# Altium PCB PCB1.PcbDoc
Units mil, origin at the board's own origin, x right, y up, seen from the top; angles counter-clockwise.
Board outline 1230.03 x 1220.03 mil, 2 copper layers (Top Layer, Bottom Layer), stack 62.192 mil thick; 29 components, 15 nets, 77 pads, 16 vias.
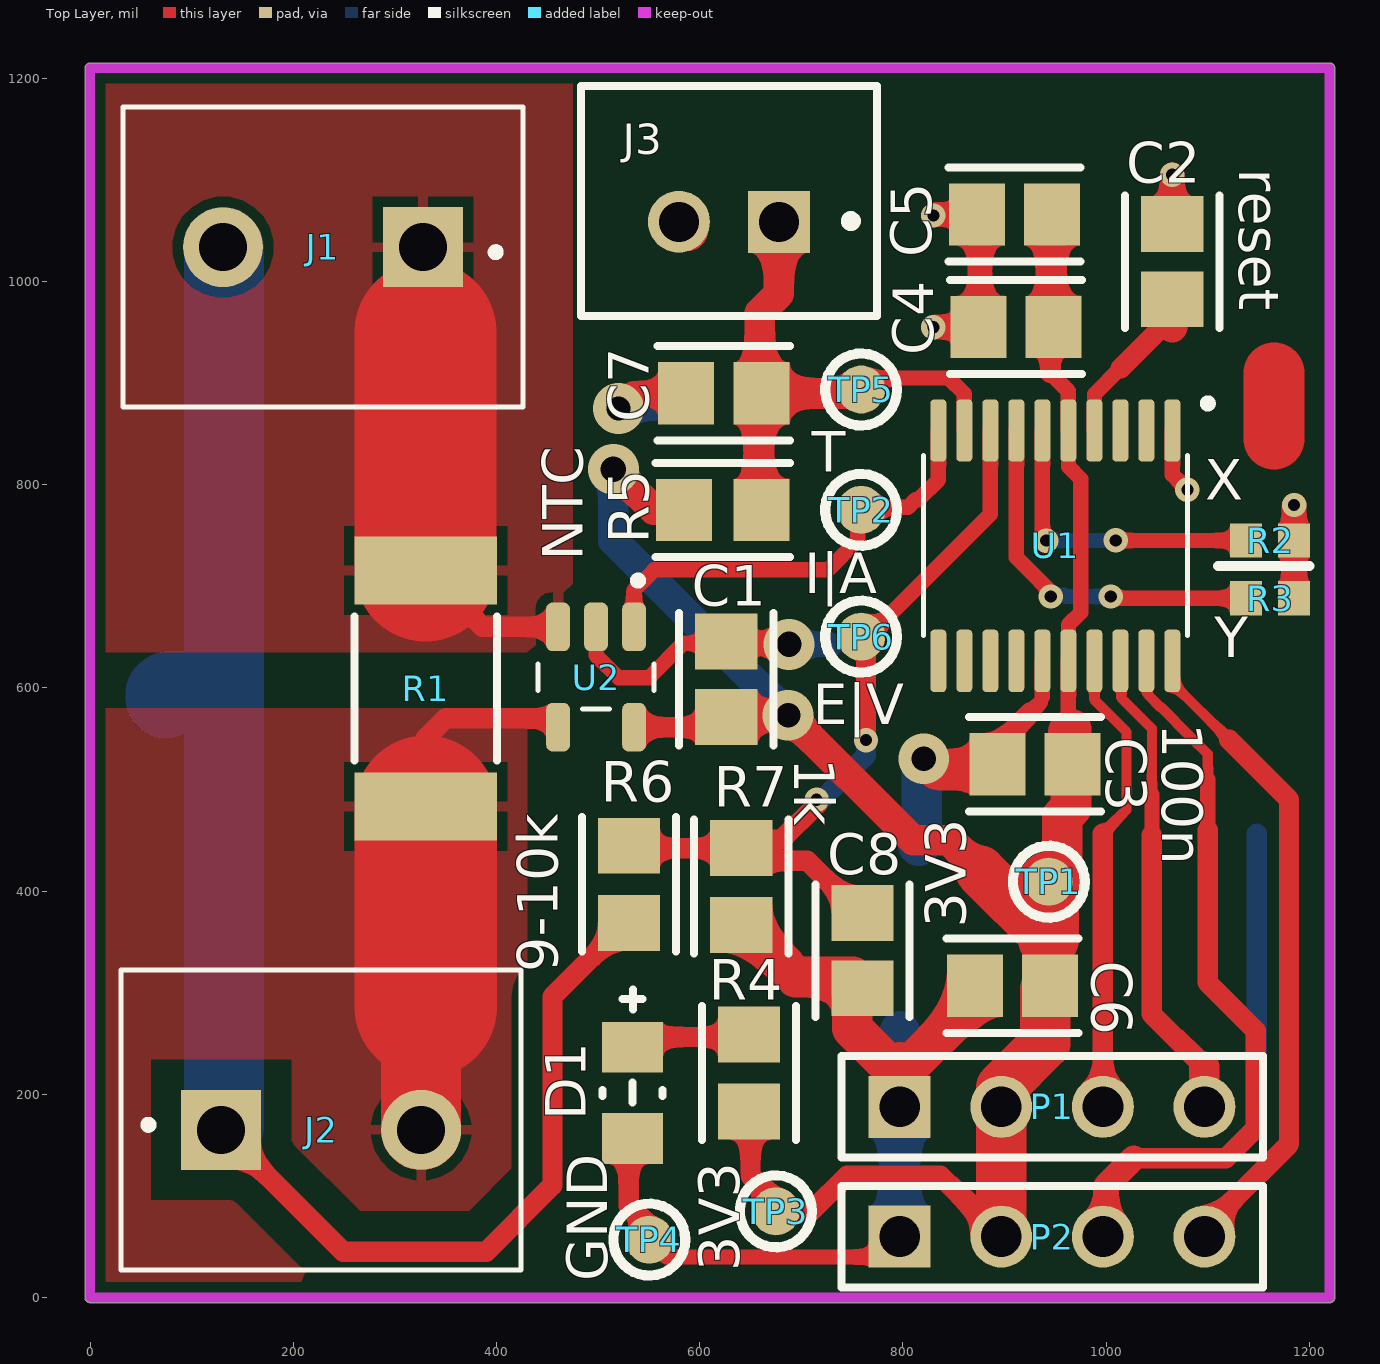
[diagram p0: Top Layer view]
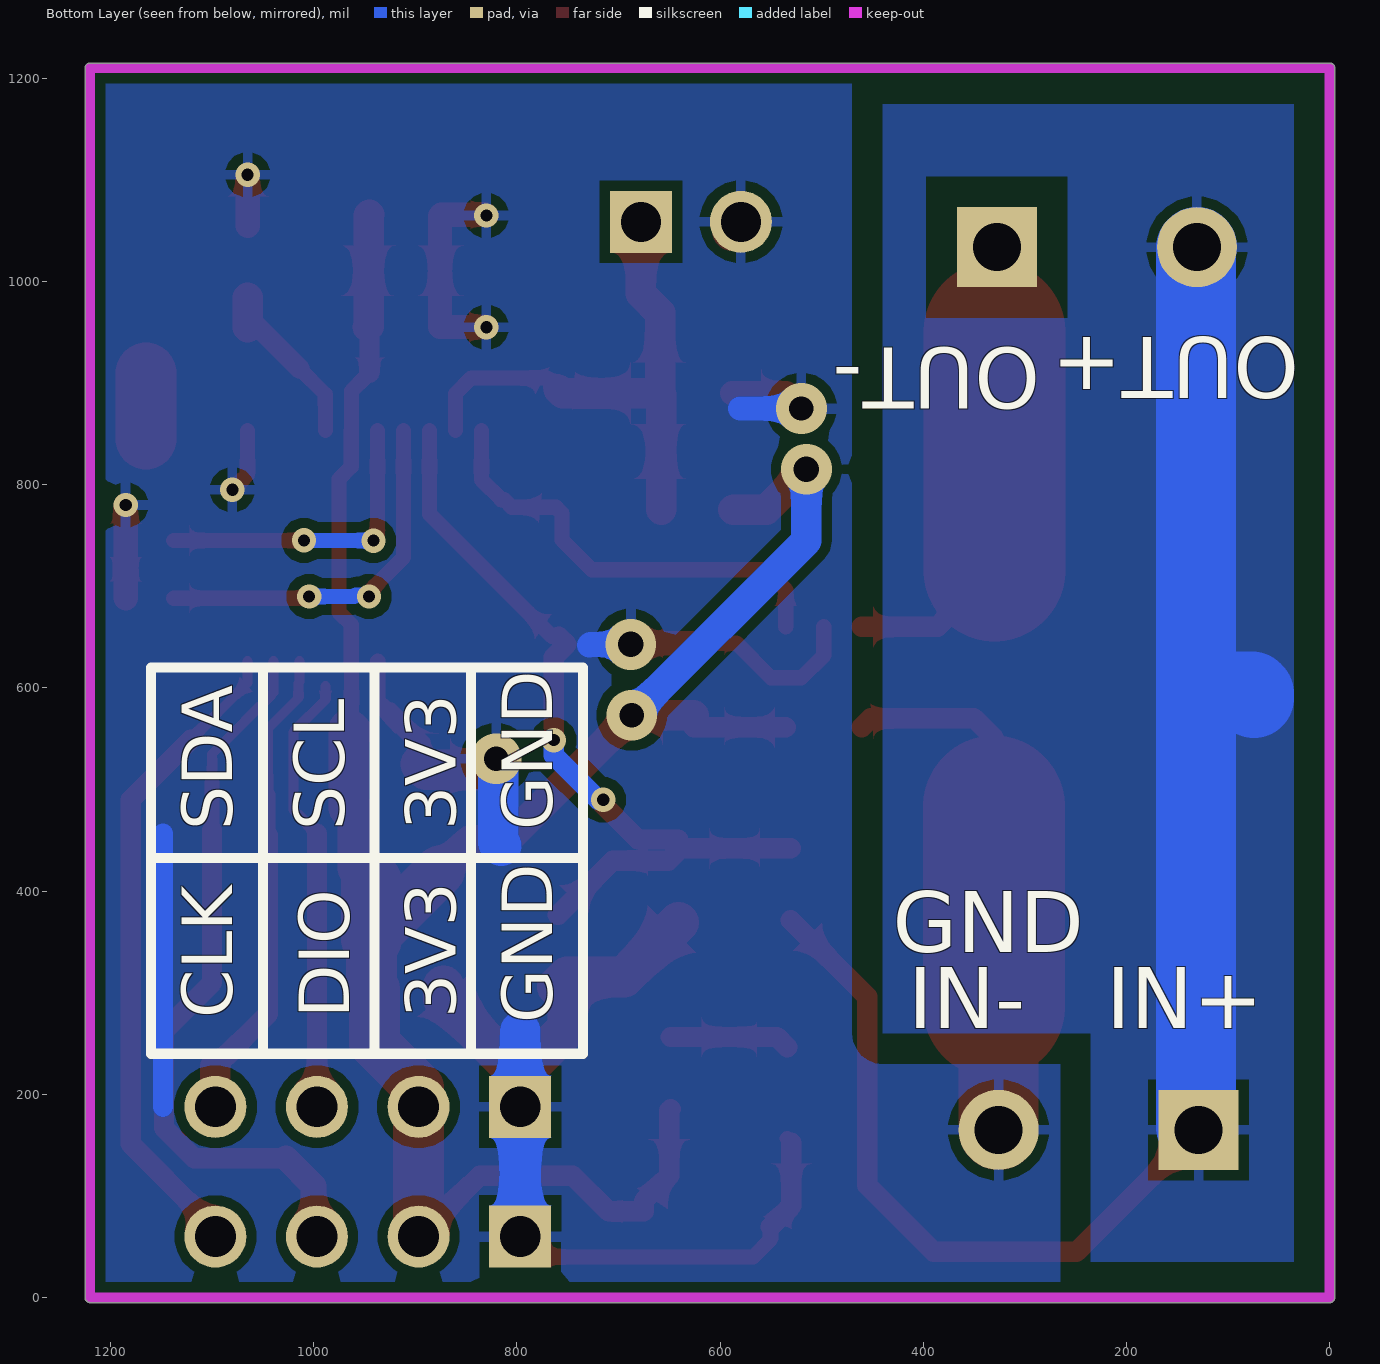
[diagram p1: Bottom Layer view, seen from below]
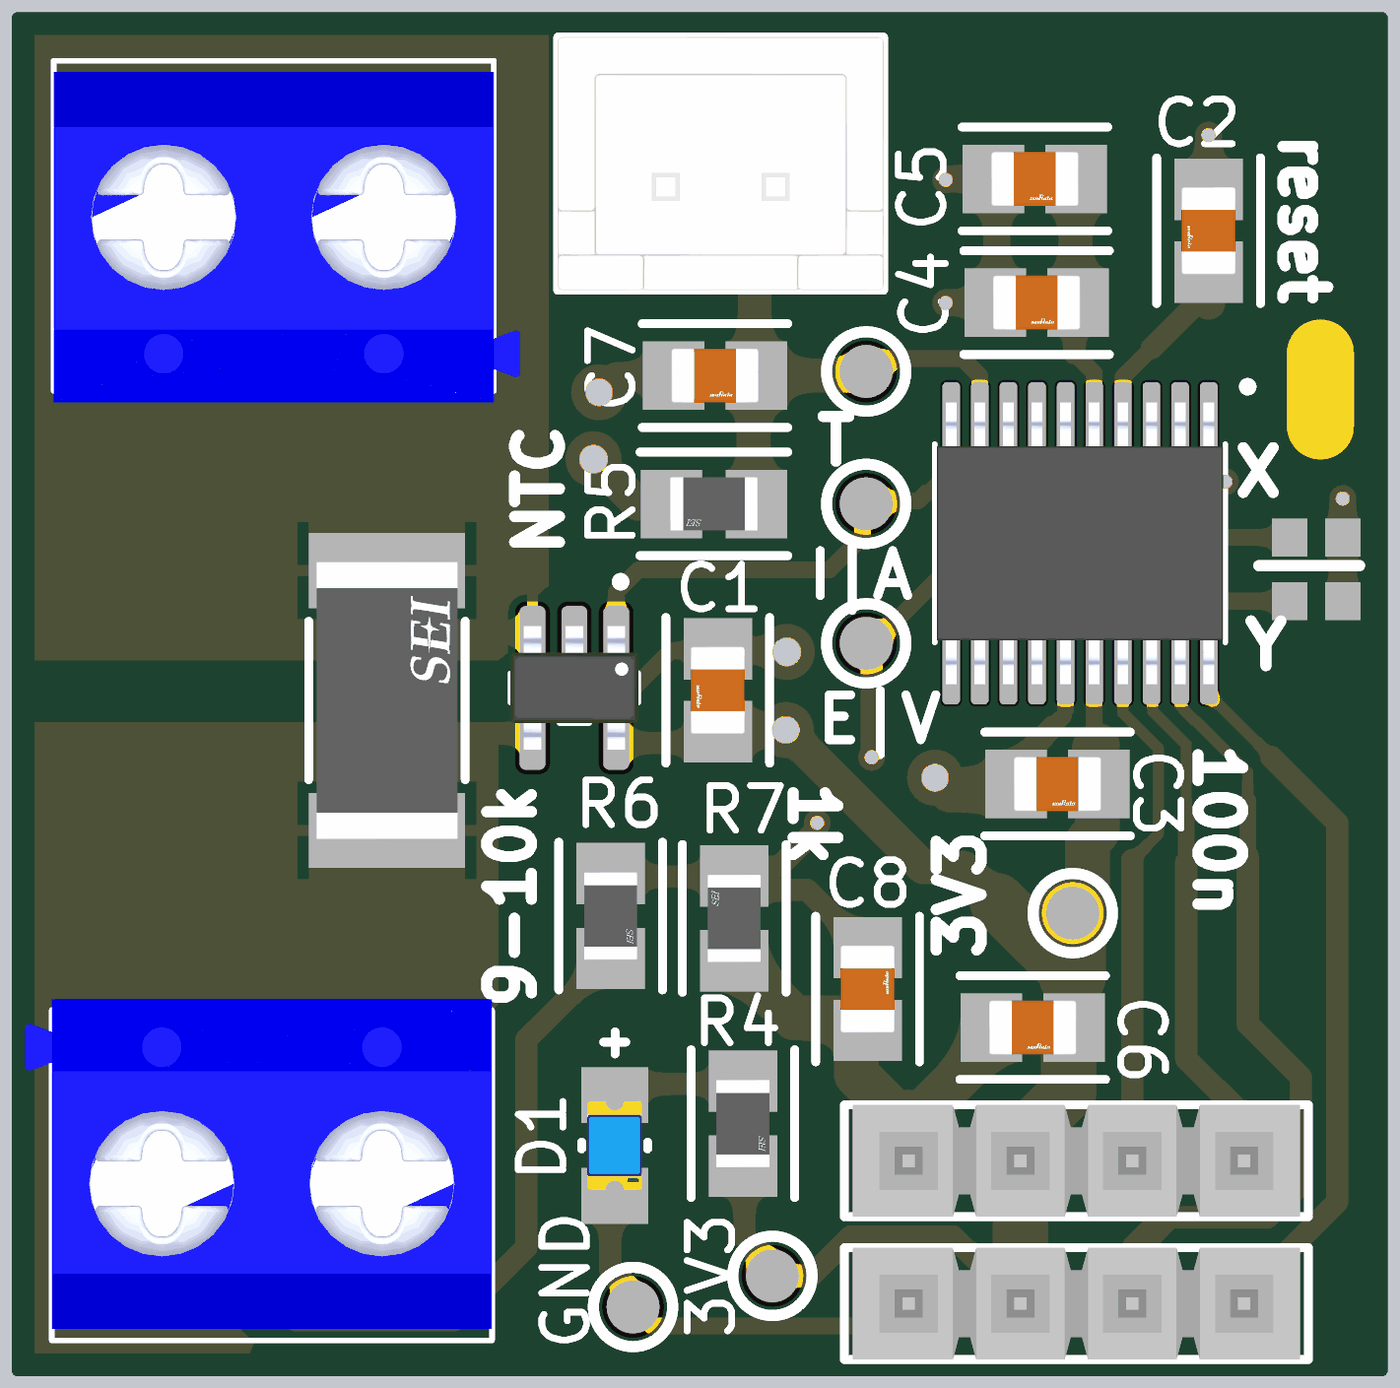
[diagram p2: 3D render of the assembled board from above, using the file's embedded part models]

## Layer stack, top to bottom
Top Solder: solder mask 0.4, Solder Resist, Dk 3.5
Top Layer: signal copper 1.4
Dielectric 1: dielectric 59.3921, FR-4, Dk 4.8
Bottom Layer: signal copper 1.4
Bottom Solder: solder mask 0.4, Solder Resist, Dk 3.5

## Board outline
-5.01,0 -5.01,1210 cw(c0,1210) 0,1215.01 1220,1215.01 cw(c1220,1210) 1225.01,1210 1225.01,0 cw(c1220,0) 1220,-5.02 0.03,-5.01 cw(c0,0)

## Design rules (kind name [scope] priority, off if disabled: settings)
Clearance [InNet('V+')] p1: gap=30 ignorepadtopadclearanceinfootprint=TRUE
Clearance Clearance_1 [All] p2: gap=10 ignorepadtopadclearanceinfootprint=TRUE
MinimumSolderMaskSliver [All] p1: minsoldermaskwidth=5
PolygonConnect [All] p1: connectstyle=Relief reliefconductorwidth=10 reliefentries=4 polygonreliefangle="90 Angle" airgapwidth=10
RoutingVias [All] p1: holewidth=12 width=24 viastyle="Through Hole" minholewidth=12 minwidth=24 maxholewidth=50 maxwidth=50
SolderMaskExpansion [All] p1: expansion=4 istentingtop=FALSE
SupplyNets "Schematic Supply Nets_2" [InNet('GND')] p1: voltage=0.000
SupplyNets "Schematic Supply Nets" [InNet('3.3V')] p2: voltage=0.000
Width [All] p1: maxlimit=393.7 minlimit=10 preferedwidth=10 minimp=50.000000 maximp=50.000000 favimp=50.000000
29 further rules are at their usual default settings.

## Components (designator, comment, footprint, x,y, rotation, side; value= is the part's Value field where it differs from the comment)
C1 "0805 100n" "CAP 0805 IPC_A" 626.12,608.55 r270 top
C2 "0805" "CAP 0805 IPC_A" 1065,1019.54 r270 top
C3 "0805 100n" "CAP 0805 IPC_A" 929.92,524.76 r0 top
C4 "0805 100n" "CAP 0805 IPC_A" 911.19,955.24 r0 top
C5 "0805 10n" "CAP 0805 IPC_A" 909.72,1065.88 r0 top
C6 "0805 4uF" "CAP 0805 IPC_A" 907.73,306.89 r0 top
C7 "0805" "CAP 0805 IPC_A" 623.62,889.97 r0 top
C8 "0805" "CAP 0805 IPC_A" 760.08,341.34 r90 top
D1 "LED 0805 1.8 V" "LED-0805- MFG" 533.94,201.39 r270 top
J1 "KF301-2P" KF301 229.1,1033.83 r180 top
J2 "KF301-2P" KF301 227.41,165 r0 top
J3 "XH2.54 NTC 10k" B2B-XH-A_LF_SN-MFG 628.7,1079.49 r180 top
P1 "TSW-104-08-G-S" HEADER4PIN 796.77,187.72 r0 top
P2 "TSW-104-08-G-S" HEADER4PIN 796.77,60 r0 top
R1 "2512 0.01ohm" "R 2512 A" 330.31,599.41 r90 top
R2 "0603" 0603-IPC_C 1161.34,745.16 r180 top
R3 "0603" 0603-IPC_C 1161.34,688.25 r180 top
R4 "0805 10k" "R 0805 A" 648.58,220.99 r270 top
R5 "0805 10k" "R 0805 A" 622.66,775.25 r180 top
R6 "0805 9k" "R 0805 A" 530.29,406.66 r270 top
R7 "0805 1k" "R 0805 A" 640.88,404.53 r90 top
TP1 "test point" testpoint 943.54,409.25 r0 top
TP2 "test point" testpoint 758.82,775.26 r0 top
TP3 "test point" testpoint 674.95,84.82 r0 top
TP4 "test point" testpoint 550.34,57.02 r0 top
TP5 "test point" testpoint 758.82,893.7 r0 top
TP6 "test point" testpoint 758.82,650.53 r0 top
U1 "STM32F030F4P6" "STM32F030 - 20PIN" 950,740 r270 top
U2 "INA180" INA180 497.89,610.71 r270 top

## Footprints (in the part's own frame and the unit in brackets; to place one, negate y for a bottom-side part, rotate by r counter-clockwise, add the part's x,y. Pads: shape width x height; smd on the part's side, far side on the other; paste and mask are expansions set on the pad)
0603-IPC_C [mil]
  rect 31.73x33.79 smd paste+0 mask+0: 1(-23.66,0) 2(23.66,0)
B2B-XH-A_LF_SN-MFG [mm]
  rect 1.55x1.55 hole 1 paste-2539.97: 1(-1.25,0.525)
  round 1.55 hole 1 paste-2539.97: 2(1.25,0.525)
  silkscreen extent -3.7,-2.88 3.7,2.88, body extent -3.8,-2.98 3.8,2.98, height 0.25
"CAP 0805 IPC_A" [mil] "FP-GRM21A-0_2-IPC_A"
  rect 55x61.27 smd paste+0 mask+0: 1(-37,0) 2(37,0)
  silkscreen extent -65,-46 65,46, body extent -85,-50 85,50, height 10
HEADER4PIN [mm] ".025 SQ Post Terminal Strip Assembly, 1x4 Pins, Vertical, 2.54mm Pitch, Male"
  rect 1.55x1.55 hole 1.02: 1(0,0)
  round 1.55 hole 1.02: 2(2.54,0) 3(5.08,0) 4(7.62,0)
  silkscreen extent -1.46,-1.27 9.08,1.27, body extent -1.27,-1.27 8.89,1.27, height 8.38
INA180 [mm]
  rrect50% 1.21x0.59 smd: 1(-1.255,0.95) 2(-1.255,0) 3(-1.255,-0.95) 4(1.255,-0.95) 5(1.255,0.95)
  silkscreen extent -2.51,-1.45 0.8,1.45, body extent -1.4,-1.45 1.4,1.45, height 1.45
KF301 [mm]
  rect 2x2 hole 1.2: 1(-2.5,0)
  round 2 hole 1.2: 2(2.5,0)
  silkscreen extent -5,-3.5 5,4, body extent -5.6,-3.24 5,4.26, height 10
"LED-0805- MFG" [mil]
  rect 50x60 smd paste+0 mask+0: 1(-45,0) 2(45,0)
  silkscreen extent -102,-30 10,30, body extent -68,-33 68,33, height 10
"R 0805 A" [mil] "FP-HCJ0805-IPC_A"
  rect 55x61.22 smd paste+0 mask+0: 1(-38,0) 2(38,0)
  silkscreen extent -66,-46 66,46, body extent -86,-50 86,50, height 10
"R 2512 A" [mil] "FP-RMCF2512-IPC_A"
  rect 67.1x139.96 smd paste+0 mask+0: 1(-116.18,0) 2(116.18,0)
  silkscreen extent -71,-70 71,70, body extent -169,-90 169,90, height 10
"STM32F030 - 20PIN" [mm]
  rrect50% 1.56x0.4 smd mask+0.051: 1(-2.88,2.925) 2(-2.88,2.275) 3(-2.88,1.625) 4(-2.88,0.975) 5(-2.88,0.325) 6(-2.88,-0.325) 7(-2.88,-0.975) 8(-2.88,-1.625) 9(-2.88,-2.275) 10(-2.88,-2.925) 11(2.88,-2.925) 12(2.88,-2.275) 13(2.88,-1.625) 14(2.88,-0.975) 15(2.88,-0.325) 16(2.88,0.325) 17(2.88,0.975) 18(2.88,1.625) 19(2.88,2.275) 20(2.88,2.925)
  silkscreen extent -3.66,-3.3 2.25,3.91, body extent -3.2,-3.25 3.2,3.25, height 1.18
testpoint [mm]
  round 1.2 smd: 1(0,0)
  silkscreen extent -0.9,-0.9 0.9,0.9

## Part data
C1 C2 C3 C4 C5 C6 C7 C8: library part CAP, "Chip Multilayer Ceramic Capacitors for General Purpose, 0805, 2200pF, C0G, 30ppm/°C, 5%, 250V", Capacitance=2.2nF, Dielectric=C0G, Tolerance=5%, Voltage Rating (DC)=250V, Length=2mm, Thickness=1mm, Width=1.25mm
D1: library part "led 0805", "LED BLUE CLEAR 0805 SMD", Case Code (Imperial)=0805, Case Code (Metric)=2012, Color=Blue, Forward Current=20mA, Forward Voltage=3.3V, Lens Color=Colorless, Max Operating Temperature=80°C, Min Operating Temperature=-30°C, Package Quantity=3000, Power Rating=100mW, Case/Package=0805, Dominant Wavelength=470nm, Height=1.1mm, Illumination Color=Blue, Lead Free="Lead Free", Length=2mm, Lens Style=Rectangular, Lens Transparency=Clear, Luminous Intensity=115mcd, Mount="Surface Mount", Number of Pins=2, Packaging="Tape and Reel", Test Current=20mA, Viewing Angle=130°, Wavelength=470nm, Width=1.2mm
J1 J2: "2 Pin Terminal Block 5mm Pitch", Package=None, Check_prices=https://www.snapeda.com/parts/KF301-2P/Handson+Technology/view-part/?ref=eda, MF="Handson Technology", MP=KF301-2P, SnapEDA_Link=https://www.snapeda.com/parts/KF301-2P/Handson+Technology/view-part/?ref=snap
J3: library part "XH2.54 2 pin", "CONN HEADER VERT 2POS 2.5MM", Color=Natural, Contact Resistance=20mR, Current Rating=3A, Housing Color=White, Insulation Resistance=1GR, Max Operating Temperature=85°C, Max Voltage Rating (AC)=250V, Min Operating Temperature=-25°C, Connector Type="Male Pin", Contact Material=Brass, Contact Plating=Tin, Contact Type="Male Pin", Depth=5.75mm, Fastening Type=Detent, Housing Material=Polyamide, Lead Free="Lead Free", Lead Pitch=2.5mm, Length=7.4mm, Max Current Rating=3A, Max Voltage Rating (DC)=250V, Mount="Through Hole", Number of Contacts=2, Number of Positions=2, Number of Rows=1, Orientation=Straight, Packaging=Bulk, Pitch=2.5mm, REACH SVHC="No SVHC", Series=XH, Termination=Solder, Voltage Rating=250V, Voltage Rating (AC)=250V, Wire/Cable Gauge=22AWG
P1 P2: library part header4pin, "0.025\" SQ Post Header, Through-hole, Vertical, -55 to 125 degC, 2.54 mm Pitch, 4-Pin, Male, RoHS", Manufacturer=Samtec, Temperature Range="-55 to 125 degC", ComponentLink1Description="Manufacturer URL", ComponentLink1URL=http://www.samtec.com, ComponentLink2Description=Datasheet, ComponentLink2URL=http://www.samtec.com/documents/webfiles/pdf/TSW_TH.PDF, ComponentLink3Description="Package Specification", ComponentLink3URL=http://www.samtec.com/documents/webfiles/cpdf/TSW-XXX-XX-XXX-X-XX-XXX-MKT.pdf, DatasheetVersion=F-214, Mounting Technology=Through-hole, Orientation=Vertical, PackageDescription=".025[0.64] SQ. Post Terminal Strip Assembly", PackageReference=TSW-104-08-X-S, PackageVersion="DM, 8/1988", PartNumber=TSW-104-08-G-S, Pitch="2.54 mm", RoHS=True
R1: library part "R 2512", Case Code (Imperial)=0805, Case Code (Metric)=2012, Max Operating Temperature=155°C, Min Operating Temperature=-55°C, Package Quantity=1, Resistance=0mR, Case/Package=0805, Height=0.026inch, Lead Free="Lead Free", Length=0.079inch, Mount="Surface Mount", Number of Terminations=2, Packaging="Tape and Reel", Radiation Hardening=No, RoHS Compliant=Yes, Termination=Wraparound, Width=0.049inch
R4 R5 R6 R7: library part "R 0805", Case Code (Imperial)=0805, Case Code (Metric)=2012, Max Operating Temperature=155°C, Min Operating Temperature=-55°C, Package Quantity=1, Resistance=0mR, Case/Package=0805, Height=0.026inch, Lead Free="Lead Free", Length=0.079inch, Mount="Surface Mount", Number of Terminations=2, Packaging="Tape and Reel", Radiation Hardening=No, RoHS Compliant=Yes, Termination=Wraparound, Width=0.049inch
TP1 TP2 TP3 TP4 TP5 TP6: library part testpoint
U1: "ARMÂ® CortexÂ®-M0 STM32F0 Microcontroller IC 32-Bit Single-Core 48MHz 16KB (16K x 8) FLASH", Package="TSSOP-20 STMicroelectronics", Check_prices=https://www.snapeda.com/parts/STM32F030F4P6/STMicroelectronics/view-part/?ref=eda, MF=STMicroelectronics, MP=STM32F030F4P6, SnapEDA_Link=https://www.snapeda.com/parts/STM32F030F4P6/STMicroelectronics/view-part/?ref=snap
U2: "26V, 350kHz current sense amplifier", Package="SOT-23-5 Texas Instruments", Check_prices=https://www.snapeda.com/parts/INA180B1IDBVT/Texas+Instruments/view-part/?ref=eda, MF="Texas Instruments", MP=INA180B1IDBVT, SnapEDA_Link=https://www.snapeda.com/parts/INA180B1IDBVT/Texas+Instruments/view-part/?ref=snap

## Via types
v1: diameter 24, hole 12, Top Layer to Bottom Layer, tented both sides, 11 vias
v2: diameter 50, hole 24, Top Layer to Bottom Layer, tented both sides, 2 vias
v3: diameter 50, hole 25, Top Layer to Bottom Layer, tented both sides, 2 vias
v4: diameter 50, hole 24, Top Layer to Bottom Layer, tented bottom, 1 vias

## Nets (pads, with @x,y where several pads share a name; then routed paths per layer and width w, separated by ;. In a path a pad name is that pad's centre, name@x,y a point inside that pad or via, vN(x,y) a via of type N, cw(c..) or ccw(c..) an arc to the next point about the centre after c; other vN are vias at no path point)
3.3V: C1.2 C3.2 C4.2 C5.2 C6.2 P1.2 P2.2 R4.2 R5.2 TP1.1 TP3.1 U1.5 U1.16 U2.5 | length 2316.1
  Top Layer w15: 945,910 962.8,892.2 U1.5 963.01,853.17 963.01,817.73 975,805.75 975,674.25 963.01,662.27 963.01,626.83 U1.16 962.8,572.2
  Top Layer w20: U2.5 C1.2@626.12,561.3 ; R4.2@648.58,185.54 650,184.12 650,120 674.95,95.05 TP3.1 709.82,84.82 745,120 836.77,120 P2.2 ; 945,910 945,953.59 C4.2@946.65,955.24
  Top Layer w30: v3(515,815.21) 515,815 554.75,775.25 R5.2@587.21,775.25 ; C1.2@626.12,573.09 v2(686.91,573.09) 810,450 846,450 876,420 ; C5.2@945.19,1065.88 945.92,1065.15 945.92,955.97 C4.2@946.65,955.24
  Top Layer w40: TP1.1 956.77,422.47 956.77,473.34 965.38,481.95 965.38,524.76 965.38,554.03 962.77,556.64 965.47,559.34
  Top Layer w50: 876,420 943.19,352.81 943.19,306.89 940,303.7 940,250 896.77,206.77 P1.2 P2.2
  Top Layer w60: 943.19,352.81 TP1.1@943.19,408.9
  Bottom Layer w30: v3(515,815.21) 515,745 v2(686.91,573.09)
ADC_I: TP2.1 U1.10 U2.1 | length 444.7
  Top Layer w15: U2.1 535.29,696.3 555.2,716.22 726.22,716.22 755.48,745.48 755.48,771.92 761.33,777.77 804.94,777.77 812.44,785.27 815.27,785.27 834.84,804.84 U1.10
ADC_T: C7.2 J3.1 R5.1 TP5.1 U1.9 | length 541.9
  Top Layer w15: TP5.1 770.12,905 845,905 860.43,889.57 U1.9
  Top Layer w30: R5.1@658.11,775.25 658.11,889 C7.2@659.08,889.97 ; J3.1 677.92,987.92 659.08,969.08 C7.2@659.08,889.97 ; TP5.1 755.09,889.97 C7.2@659.08,889.97
ADC_V: C8.2 R6.1 R7.2 TP6.1 U1.8 | length 805.7
  Top Layer w15: TP6.1@765.53,650.53 886.02,771.02 U1.8
  Top Layer w20: R6.1@530.29,442.11 638.75,442.11 650.87,430 705.87,430 759.07,376.8 C8.2@760.08,376.8 ; R7.2@640.88,439.98 640.88,450.88 680.88,450.88 715,485 v1(715,490) ; TP6.1 751.16,642.88 763.66,630.38 v1(763.66,548.66)
  Bottom Layer w20: v1(715,490) 720,490 725,495 763.66,533.66 v1(763.66,548.66)
GND: C1.1 C2.1 C3.1 C4.1 C5.1 C6.1 C7.1 C8.1 D1.2 J2.2 J3.2 P1.1 P2.1 R1.1 R2.1 R3.1 R7.1 TP4.1 U1.1 U1.15 U2.2 U2.4 | length 2915.1
  Top Layer w15: U2.2 497.89,632.11 520,610 550,610 584.01,644.01 C1.1@626.12,644.01 ; D1.2@530,152.45 D1.2 ; TP4.1@550.34,69.66 TP4.1 567.36,40 776.77,40 P2.1 ; 925.47,575.91 935.3,585.73 ; 936.99,590.96 936.99,626.4 U1.15 ; U1.1 1065.16,809.84 v1(1080,795)
  Top Layer w20: R1.1 330.31,550.31 350,570 451.79,570 U2.4 ; D1.2@530,152.45 530,90 TP4.1@550.34,69.66 ; C3.1@894.46,524.76 894.46,544.89 925.47,575.91
  Top Layer w24: v2(520,875) 534.97,889.97 C7.1@588.16,889.97 ; C1.1@626.12,644.01 670.99,644.01 680,635 v3(687.86,642.86) ; v1(830,955) 830.24,955.24 875.72,955.24 875.72,1064.42 874.26,1065.88 830.88,1065.88 v1(830,1065) ; C2.1@1065,1055 v1(1065,1105) ; R3.1 R2.1 v1(1185,780)
  Top Layer w40: J3.2 J3.2@588.16,1050.16 ; R7.1@640.9,369.08 694.48,315.5 750.46,315.5 760.08,305.88 759.62,305.88 750,296.26 750,265 P1.1@796.77,218.23 ; P1.1 P1.1@796.77,218.23 ; 796.77,231.39 P1.1@796.77,218.23 ; v4(820.39,530.36) 823.1,530.36 834.04,519.41 889.11,519.41 C3.1@894.46,524.76 ; C6.1@872.27,306.89 872.27,293.73 P1.1@796.77,218.23
  Top Layer w78.74: J2.2 325.83,281.74 328.43,284.34
  Top Layer w140: 330.31,286.22 R1.1
  Bottom Layer w20: 1148.23,187.72 1148.23,456.77
  Bottom Layer w24: v2(520,875) 580,875 ; v3(687.86,642.86) 727.75,642.86 728.63,641.97
  Bottom Layer w40: P2.1 P1.1 796.77,261.77 ; 815.36,444.64 818.48,447.77 818.48,528.44 v4(820.39,530.36)
IN+: J1.1 R1.2 U2.3 | length 532.1
  Top Layer w20: R1.2 385.79,660.12 U2.3
  Top Layer w78.74: J1.1 327.52,952.48 330,950
  Top Layer w118.11: 330,890 330,950
  Top Layer w140: R1.2@330,715.9 330,950
NetC2_2: C2.2 U1.4 | length 168.5
  Top Layer w15: U1.4 988.39,878.39 988.6,878.6 988.6,889.04 1014.27,914.7
  Top Layer w20: 1014.27,914.7 1054.57,955 1065,955
  Top Layer w30: 1065,955 C2.2@1065,984.08
NetD1_1: D1.1 R4.1 | length 118.8
  Top Layer w20: D1.1 543.98,256.44 R4.1@648.58,256.44
NetR2_2: R2.2 U1.6 | length 307.5
  Top Layer w15: U1.6 937.2,747.8 940,745 v1(941.11,745) ; v1(1009.5,745.16) R2.2
  Bottom Layer w15: v1(941.11,745) 941.11,745.16 950.16,745.16 950.32,745 995,745 995.16,745.16 v1(1009.5,745.16)
NetR3_2: R3.2 U1.7 | length 374.4
  Top Layer w15: U1.7 911.61,728.39 947.75,692.25 v1(945.5,690) ; v1(1004.5,690) 1004.5,688.25 R3.2
  Bottom Layer w15: v1(945.5,690) 950,690 951.47,691.47 958.53,691.47 960,690 1000,690 v1(1004.5,690)
SCL: P1.3 U1.17 | length 436.6
  Top Layer w10: U1.17@988.39,601.61 988.39,588.33 1020,556.72 1020,480 996.77,456.77
  Top Layer w20: P1.3 996.77,456.77
SDA: P1.4 U1.18 | length 473.2
  Top Layer w10: U1.18 1013.98,606.02 1015,605 1015,590 1045,560 1045,520.21 1045,495
  Top Layer w15: 1045,455 1045,495
  Top Layer w20: 1045,455 1045,279.04 1096.77,227.27
  Top Layer w30: P1.4 1096.77,227.27
SWCLK: P2.4 U1.20 | length 648.7
  Top Layer w10: U1.20 1065.16,604.84 1121.12,548.88
  Top Layer w20: P2.4 1110,73.23 1110,81.11 1180,151.11 1180,490 1121.12,548.88
SWDIO: P2.3 U1.19 | length 727
  Top Layer w10: U1.19 1039.57,595.43 1042.28,592.72 1042.28,592 1053.38,580.91 1054.09,580.91 1082.43,552.57 1100,535 1100,510
  Top Layer w15: 1100,460 1100,510
  Top Layer w20: 1027.2,137.2 1117.69,137.2 1147.28,166.79 1147.28,262.72 1100,310 1100,460
  Top Layer w25: P2.3 1000,63.23 1000,110 1027.2,137.2
V+: J1.2 J2.1 R6.2 | length 1627.6
  Top Layer w20: J2.1 130.54,163.44 130.68,163.44 141.09,153.03 249.12,45 389.7,45 455,110.3 455,295.92 R6.2@530.29,371.22
  Bottom Layer w78.74: 74.37,590 74.37,594.37 76.46,596.46 131.57,596.46 ; J2.1 131.57,167.59 131.57,596.46 ; J1.2 131.57,1032.92 131.57,596.46
pads on no net: U1.2 U1.3 U1.11 U1.12 U1.13 U1.14
copper on no net: | length 65
  Top Layer w60: 1165,845 1165,910

## Polygon pours and split planes (outlines as drawn)
GND on Bottom Layer "GND_L02_P004" (solid, pour order 4): 1223.65,1203.29 465,1203.29 465,-8.66 1221.7,-8.66 1223.65,-6.71
GND on Bottom Layer "GND_L02_P006" (solid, pour order 6): 240,250 490,250 490,0 240,0
V+ on Bottom Layer "V+_L02_P008" (solid, pour order 8): 0,1210 440,1210 440,260 235,260 235,5 240,0 0,0
GND on Top Layer "GND_L01_P007" (solid, pour order 7): 0,0 0,580 430,580 430,0
IN+ on Top Layer "IN+_L01_P009" (solid, pour order 9): 0,1210 475,1210 475,635 0,635

## Keep-outs
Keep-Out Layer:
  lines w10: 0,0 0,1210 1220,1210 1220,0 0,0

## Silkscreen, mask and mechanical layers (free items; w line width, h text height)
Top Overlay:
  lines w10: 1110,720 1200,720
  text "reset" at 1131,1111 h40 r270
  text "T" at 710,813 h40
  text "X" at 1135,785 h40
  text "NTC" at 485,725 h40 r90
  text "I|A" at 703,693 h40
  text "Y" at 1140,630 h40
  text "100n" at 1055,565 h40 r270
  text "E|V" at 711,564 h40
  text "1k" at 693,531 h40 r270
  text "3V3" at 862,364 h40 r90
  text "9-10k" at 460,320 h40 r90
  text "3V3" at 639,26 h40 r90
  text "GND" at 509,16 h40 r90
Bottom Overlay:
  lines w10: 735,432.5 1160,432.5 ; 845,240 845,620 ; 940,240 940,620 ; 1050,240 1050,620 ; 735,240 1160,240 1160,620 735,620 735,240
  text "OUT+" at 30,945 h60 r180
  text "OUT-" at 285,935 h60 r180
  text "GND" at 765,460 h50 r270
  text "3V3" at 860,460 h50 r270
  text "SCL" at 970,460 h50 r270
  text "SDA" at 1080,460 h50 r270
  text "GND" at 430,340 h60
  text "3V3" at 860,275 h50 r270
  text "DIO" at 965,275 h50 r270
  text "CLK" at 1080,275 h50 r270
  text "GND" at 765,270 h50 r270
  text "IN+" at 220,265 h60
  text "IN-" at 415,265 h60